# Altium PCB ON_OFF_POWER_LED_v2_pcb.PcbDoc
Units mil, origin at the board's own origin, x right, y up, seen from the top; angles counter-clockwise.
Board outline 3149.61 x 1417.32 mil, 2 copper layers (Top Layer, Bottom Layer); 21 components, 19 nets, 61 pads, 20 vias.
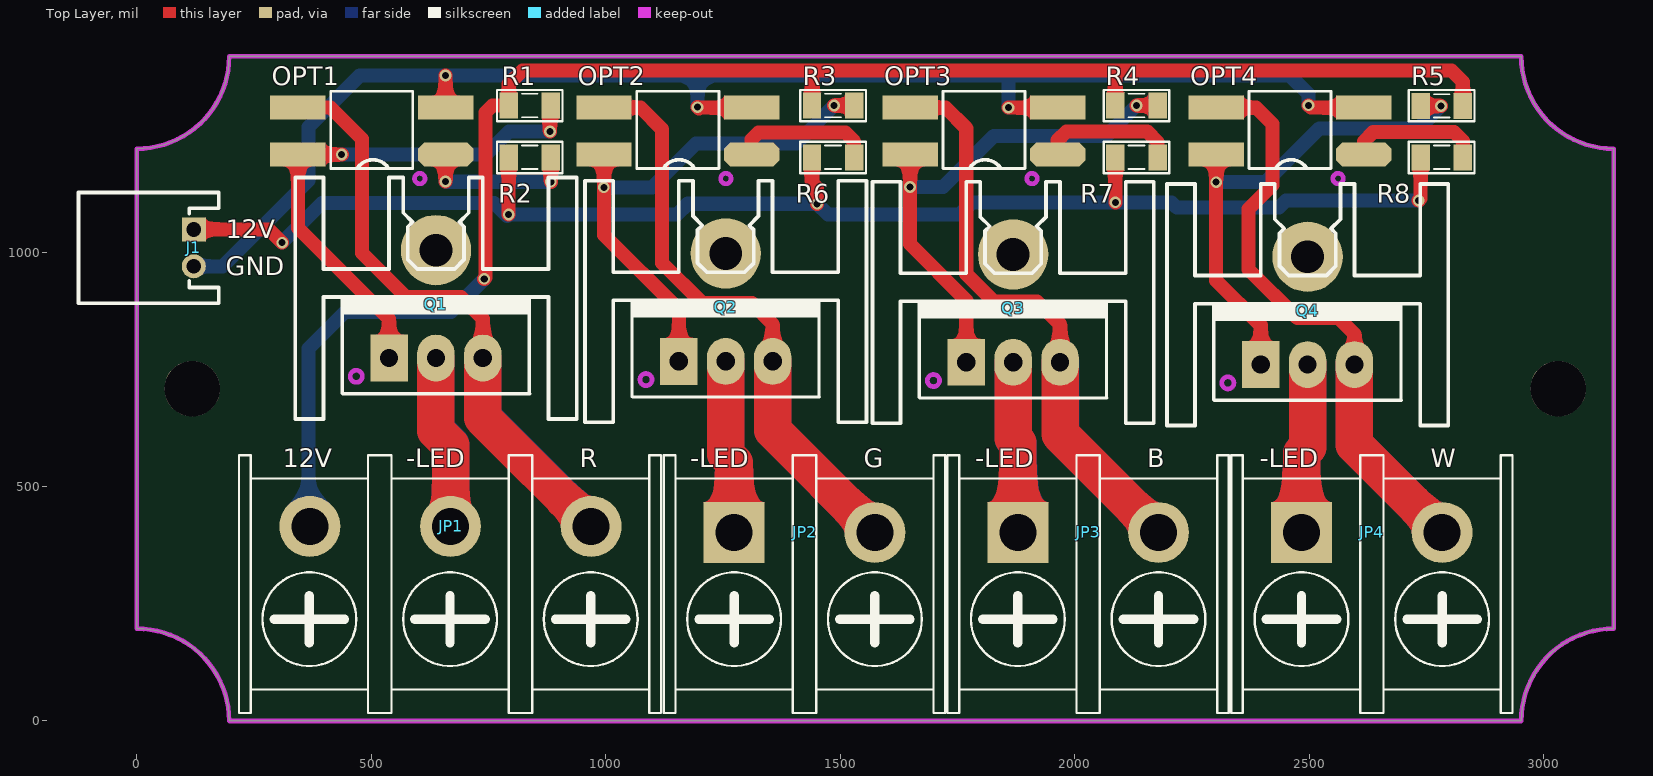
[diagram p0: Top Layer view]
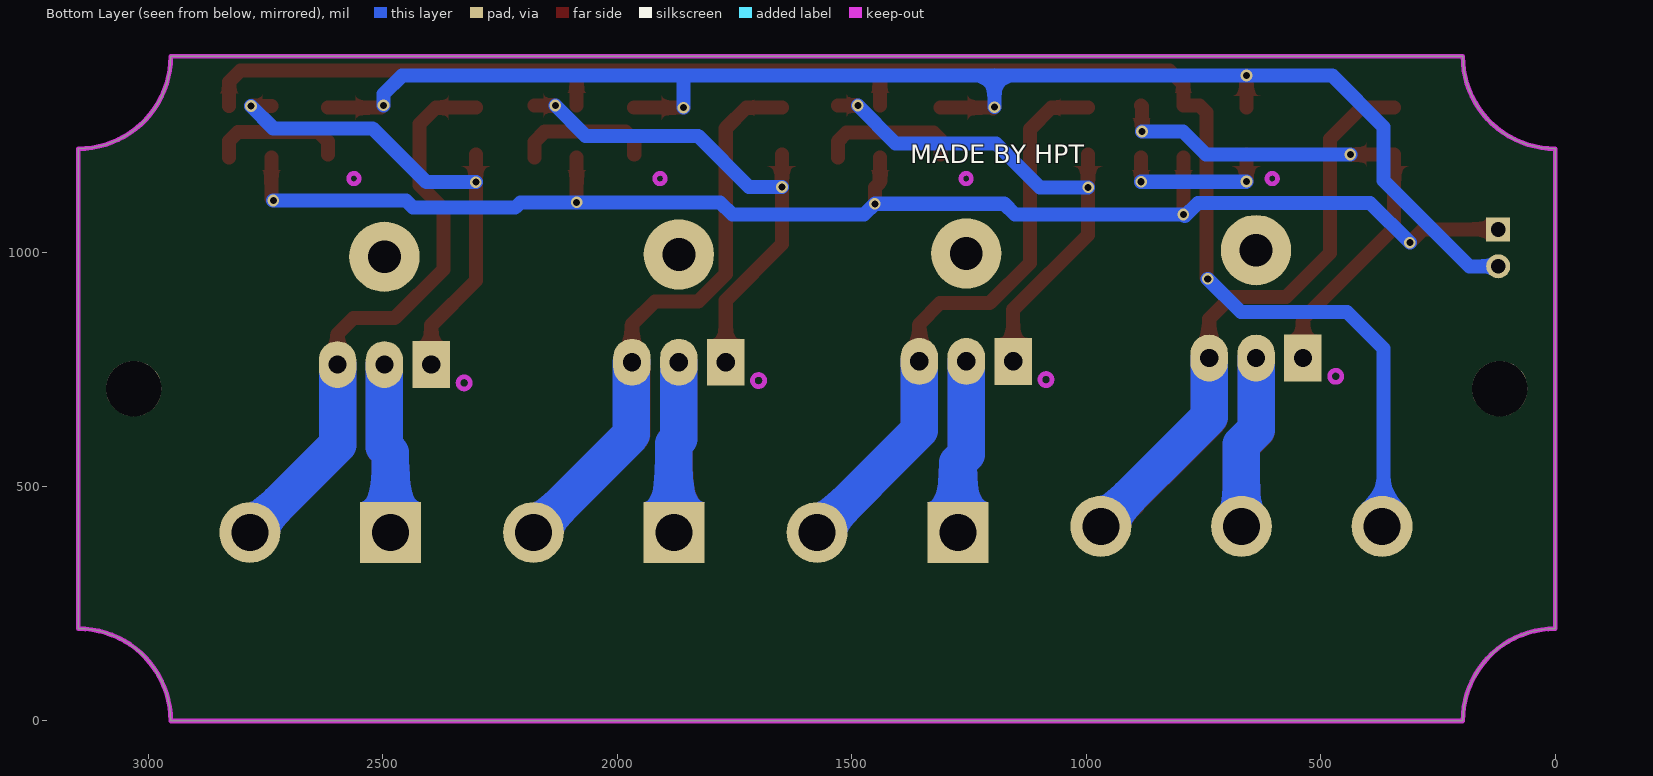
[diagram p1: Bottom Layer view, seen from below]
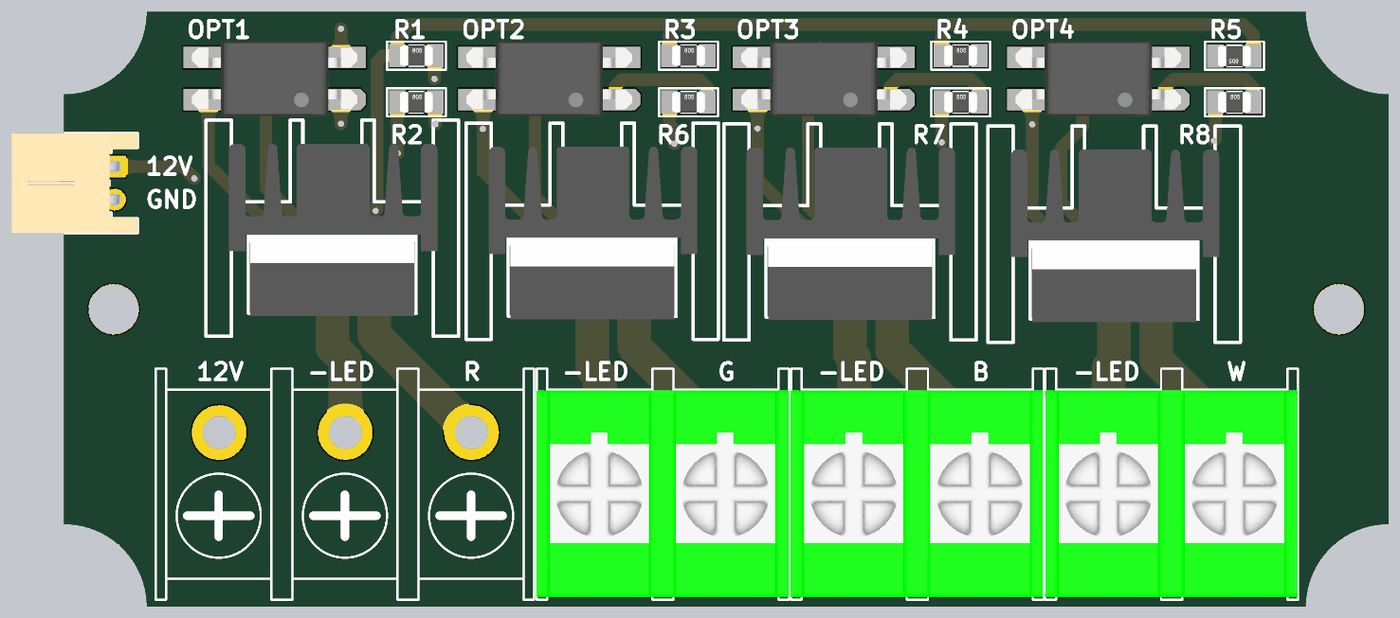
[diagram p2: 3D render of the assembled board from above, using the file's embedded part models]

## Layer stack, top to bottom
Top Solder: solder mask 0.4, Solder Resist, Dk 3.5
Top Layer: signal copper 1.4
Dielectric 1: dielectric 12.6, FR-4, Dk 4.8
Bottom Layer: signal copper 1.4
Bottom Solder: solder mask 0.4, Solder Resist, Dk 3.5

## Board outline
0,196.85 cw(c0,0) 196.85,0 2952.76,0 cw(c3149.61,0) 3149.61,196.85 3149.61,1220.47 cw(c3149.61,1417.32) 2952.76,1417.32 196.85,1417.32 cw(c0,1417.32) 0,1220.47

## Design rules (kind name [scope] priority, off if disabled: settings)
Clearance [All] p1: gap=10
PolygonConnect [All] p1: connectstyle=Relief reliefconductorwidth=10 reliefentries=4 polygonreliefangle="90 Angle" airgapwidth=10
RoomDefinition ON_OFF_POWER_LED_v2_schematic [InComponentClass('ON_OFF_POWER_LED_v2_schematic')] p1: confinementstyle=ConfineIn formatcopy=TRUE lockcomponents=FALSE outline 3605,-35 10870,-35 10870,985 3605,985
RoutingVias [All] p1: holewidth=15 width=25 viastyle="Through Hole" minholewidth=15 minwidth=25 maxholewidth=28 maxwidth=50
SolderMaskExpansion [All] p1: expansion=4
Width [All] p1: maxlimit=100 minlimit=10 preferedwidth=10
30 further rules are at their usual default settings.

## Classes and differential pairs
component class ON_OFF_POWER_LED_v2_schematic: J1 JP1 JP2 JP3 JP4 OPT1 OPT2 OPT3 OPT4 Q1 Q2 Q3 Q4 R1 R2 R3 R4 R6 R7

## Components (designator, comment, footprint, x,y, rotation, side; value= is the part's Value field where it differs from the comment)
J1 "62000211722" 62000211722 25,1009 r270 top
JP1 "JP3" "CON 3/7.62mm" 369,415 r0 top
JP2 "JP2" "CON 2/7.62mm" 1274,402 r0 top
JP3 "JP2" "CON 2/7.62mm" 1879,402 r0 top
JP4 "JP2" "CON 2/7.62mm" 2484,402 r0 top
OPT1 "PC817" "DIP-4 SMD" 658.48,1208 r180 top
OPT2 "PC817" "DIP-4 SMD" 1311.32,1208 r180 top
OPT3 "PC817" "DIP-4 SMD" 1964.16,1208 r180 top
OPT4 "PC817" "DIP-4 SMD" 2617,1208 r180 top
Q1 "IRF840" TO220H1 638,774 r0 top
Q2 "IRF840" TO220H1 1256,767 r0 top
Q3 "IRF840" TO220H1 1869,765 r0 top
Q4 "IRF840" TO220H1 2497,760 r0 top
R1 "10K" RES-SMD-0805 838,1312.66 r0 top
R2 "1K" RES-SMD-0805 838,1202 r0 top
R3 "10K" RES-SMD-0805 1485,1312.66 r0 top
R4 "10K" RES-SMD-0805 2132,1312.66 r0 top
R5 "10K" RES-SMD-0805 2783,1311.66 r180 top
R6 "1K" RES-SMD-0805 1485,1202 r0 top
R7 "1K" RES-SMD-0805 2132,1202 r0 top
R8 "1K" RES-SMD-0805 2783,1202 r0 top

## Footprints (in the part's own frame and the unit in brackets; to place one, negate y for a bottom-side part, rotate by r counter-clockwise, add the part's x,y. Pads: shape width x height; smd on the part's side, far side on the other; paste and mask are expansions set on the pad)
62000211722 [mm] "2.00mm Male Horizontal Shrouded Header, 2p"
  rect 1.3x1.3 hole 0.8: 1(-1,2.45)
  round 1.3 hole 0.8: 2(1,2.45)
  silkscreen extent -3,-3.8 3,3.8, body extent -3,-3.8 3,3.8, height 4.85
"CON 2/7.62mm" [mm] "CON 2 HB9500-2P 9.5MM"
  rect 3.3x3.3 hole 2: 1(0,0)
  round 3.3 hole 2: 2(7.62,0)
  silkscreen extent -3.81,-9.78 11.43,4.19, body extent -3.84,-9.63 11.4,2.87, height 12.5
"CON 3/7.62mm" [mm] "CON 2 HB9500-2P 9.5MM"
  round 3.3 hole 2: 1(0,0) 2(7.62,0) 3(15.24,0)
  silkscreen extent -3.84,-10.11 19.02,3.86
"DIP-4 SMD" [mm]
  oct 3x1.3 smd: 1(0,0)
  rect 3x1.3 smd: 2(0,-2.54) 3(8,-2.54) 4(8,0)
  Keep-Out Layer circle w0.254: c1.397,1.3 r0.284
  silkscreen extent 1.78,-3.43 6.22,0.76, body extent -1,-3.56 9,1.02, height 3.75
RES-SMD-0805 [mil]
  rect 39.37x55 smd: 1(-45,0) 2(45,0)
  silkscreen extent -70,-34 70,33, body extent -39,-25 39,25, height 31
TO220H1 [mil] "TO-220 - 1-2-3"
  round 150 hole 70: 0(0,230)
  rect 80x100 hole 39: 1(-100,0)
  oval 80x100 hole 39: 2(0,0) 3(100,0)
  Keep-Out Layer circle w10: c-170.03,-39 r12.97
  silkscreen extent -300,-130 300,385, body extent -246,-82 250,329, height 1000

## Part data
J1: "WR-WTB 2.00mm Male Horizontal Shrouded Header, 2p"
JP1: library part Con3, "Connector 3"
JP2 JP3 JP4: library part Con2, "Connector 2"
OPT1 OPT2 OPT3 OPT4: "OptoAcoplador 4 terminais"
Q1 Q2 Q3 Q4: "MOSFET N - CHANNEL 500V - 0.75 - 8A - TO-220"
R1 R2 R3 R4 R5 R6 R7 R8: library part Res-SMD, "Resistor"

## Free pads (board coordinates)
  round 118.11 hole 118.11: 2(118.11,708.66) 3(3031.5,708.66)

## Via types
v1: diameter 25, hole 15, Top Layer to Bottom Layer, tented both sides, 20 vias

## Nets (pads, with @x,y where several pads share a name; then routed paths per layer and width w, separated by ;. In a path a pad name is that pad's centre, name@x,y a point inside that pad or via, vN(x,y) a via of type N, cw(c..) or ccw(c..) an arc to the next point about the centre after c; other vN are vias at no path point)
12V_LED: JP1.1 R1.1 R3.1 R4.1 R5.1 | length 3530.9
  Top Layer w30: v1(741,943) 744,946 744,1298 758.66,1312.66 R1.1 793,1358 822.32,1387.32 1439,1387.32 ; R3.1 1440,1386.32 1439,1387.32 ; R4.1 2087,1386.32 ; R5.1 2828,1363 2803.68,1387.32 1439,1387.32
  Bottom Layer w30: JP1.1 366,418 366,794 444,872 670,872 v1(741,943)
12V_MG: J1.1 R2.1 R6.1 R7.1 R8.1 | length 3128.2
  Top Layer w30: J1.1 281.63,1048.37 v1(310,1020) ; v1(793,1080) R2.1 ; R6.1 1440,1149 1451,1138 v1(1451,1103) ; v1(2087,1106) R7.1 ; v1(2734,1110) 2738,1114 R8.1
  Bottom Layer w30: v1(310,1020) 395,1105 762,1105 790,1077 v1(793,1080) 1152,1080 1175,1103 v1(1451,1103) 1474,1080 1755,1080 1781,1106 v1(2087,1106) 2207,1106 2218,1095 2436,1095 2451,1110 v1(2734,1110)
GND_MG: J1.2 OPT1.2 OPT2.2 OPT3.2 OPT4.2 | length 3202.6
  Top Layer w30: OPT1.2 v1(658.48,1376.48) ; v1(1196,1309) 1199,1306 1201,1308 OPT2.2 ; v1(1859,1308) OPT3.2 ; v1(2499,1313) 2504,1308 OPT4.2
  Bottom Layer w30: J1.2 182.63,969.63 366,1153 366,1267 475.48,1376.48 v1(658.48,1376.48) 659,1377 1196,1377 ; v1(1196,1309) 1196,1377 ; v1(1859,1308) 1859,1375 1861,1377 ; v1(2499,1313) 2499,1337 2459,1377 1861,1377 ; 1196,1377 1861,1377
NetJP1_2: JP1.2 Q1.2 | length 743.7
  Top Layer w80: Q1.2 638,619 669,588 JP1.2
  Bottom Layer w80: Q1.2 638,621 669,590 JP1.2
NetJP1_3: JP1.3 OPT1.3 Q1.3 | length 1716
  Top Layer w30: OPT1.3 413,1308 480,1241 480,998 574,904 691,904 738,857 Q1.3
  Top Layer w80: Q1.3 738,646.28 969,415.28 JP1.3
  Bottom Layer w80: Q1.3 738,648.28 969,417.28 JP1.3
NetJP2_1: JP2.1 Q2.2 | length 744.9
  Top Layer w80: Q2.2 1256,569 1274,551 JP2.1
  Bottom Layer w80: Q2.2 1256,569 1274,551 JP2.1
NetJP2_2: JP2.2 OPT2.3 Q2.3 | length 1708.1
  Top Layer w30: OPT2.3 1074,1308 1120,1262 1120,977 1206,891 1312,891 1356,847 Q2.3
  Top Layer w80: Q2.3 1356,620 JP2.2
  Bottom Layer w80: Q2.3 1356,620 JP2.2
NetJP3_1: JP3.1 Q3.2 | length 735.1
  Top Layer w80: Q3.2 1869,603 1879,593 JP3.1
  Bottom Layer w80: Q3.2 1869,602 1880,591 1880,403 JP3.1
NetJP3_2: JP3.2 OPT3.3 Q3.3 | length 1674
  Top Layer w30: OPT3.3 1725,1308 1769,1264 1769,953.58 1827.58,895 1920,895 1969,846 Q3.3
  Top Layer w80: Q3.3 1969,612 JP3.2
  Bottom Layer w80: Q3.3 1970,764 1970,611 JP3.2
NetJP4_1: JP4.1 Q4.2 | length 726.8
  Top Layer w80: JP4.1 2484,571 2497,584 Q4.2
  Bottom Layer w80: JP4.1 2484,572 2497,585 Q4.2
NetJP4_2: JP4.2 OPT4.3 Q4.3 | length 1684.7
  Top Layer w30: OPT4.3 2387,1308 2422,1273 2422,1143 2371,1092 2371,963 2475,859 2563,859 2597,825 Q4.3
  Top Layer w80: Q4.3 2597,589 JP4.2
  Bottom Layer w80: Q4.3 2597,589 JP4.2
NetOPT1_1: OPT1.1 R2.2 | length 334.2
  Top Layer w30: v1(658.48,1150.52) OPT1.1 ; v1(883,1150) R2.2
  Bottom Layer w30: v1(658.48,1150.52) 659,1150 v1(883,1150)
NetOPT1_4: OPT1.4 Q1.1 R1.2 | length 1128.8
  Top Layer w30: v1(437,1208) OPT1.4 343.52,1051.48 538,857 Q1.1 ; v1(881,1257) 881,1310.66 R1.2
  Bottom Layer w30: v1(437,1208) 745,1208 794,1257 v1(881,1257)
NetOPT2_1: OPT2.1 R6.2 | length 298.9
  Top Layer w30: OPT2.1 1311.32,1240.32 1326,1255 1511,1255 1530,1236 R6.2
NetOPT2_4: OPT2.4 Q2.1 R3.2 | length 1113.5
  Top Layer w30: OPT2.4 996.36,1036.64 1156,877 Q2.1 ; v1(1487.34,1312.66) R3.2
  Bottom Layer w30: v1(996,1138) 1099,1138 1193,1232 1406.68,1232 v1(1487.34,1312.66)
NetOPT3_1: OPT3.1 R7.2 | length 293.2
  Top Layer w30: OPT3.1 1964.16,1238.57 1982.59,1257 2155,1257 2177,1235 R7.2
NetOPT3_4: OPT3.4 Q3.1 R4.2 | length 1092.8
  Top Layer w30: v1(1649,1139) v1@1649.2,1139 ; OPT3.4 v1@1649.2,1139 ; Q3.1 1769,897.01 1649.2,1016.81 v1@1649.2,1139 ; v1(2132.34,1312.66) R4.2
  Bottom Layer w30: v1(1649,1139) 1719,1139 1828,1248 2067.68,1248 v1(2132.34,1312.66)
NetOPT4_1: OPT4.1 R8.2 | length 290.2
  Top Layer w30: OPT4.1 2617,1236 2637,1256 2809,1256 2828,1237 R8.2
NetOPT4_4: OPT4.4 Q4.1 R5.2 | length 1078
  Top Layer w30: OPT4.4 2302.04,938.96 2397,844 Q4.1 ; R5.2 v1(2781.66,1311.66)
  Bottom Layer w30: v1(2302,1149) 2407,1149 2522,1264 2734,1264 v1(2781.66,1311.66)
pads on no net: Q1.0 Q2.0 Q3.0 Q4.0

## Keep-outs
Keep-Out Layer:
  the board outline again, w10

## Silkscreen, mask and mechanical layers (free items; w line width, h text height)
Top Overlay:
  text "12V" at 190,1030 h40
  text "GND" at 190,951 h40
  text "12V" at 311,541 h40
  text "-LED" at 575,541 h40
  text "R" at 945.01,541 h40
  text "-LED" at 1180,541 h40
  text "G" at 1550.01,541 h40
  text "-LED" at 1788,541 h40
  text "B" at 2155.01,541 h40
  text "-LED" at 2395,541 h40
  text "W" at 2760.01,541 h40
Bottom Overlay:
  text "MADE BY HPT" at 1375,1189.51 h40